# Altium PCB Super.PcbDoc
Units mil, origin at the board's own origin, x right, y up, seen from the top; angles counter-clockwise.
Board outline 8153.53 x 2519.95 mil, 2 copper layers (Top Layer, Bottom Layer); 130 components, 91 nets, 442 pads, 124 vias.
Unrouted connection lines stored in the file: 21.
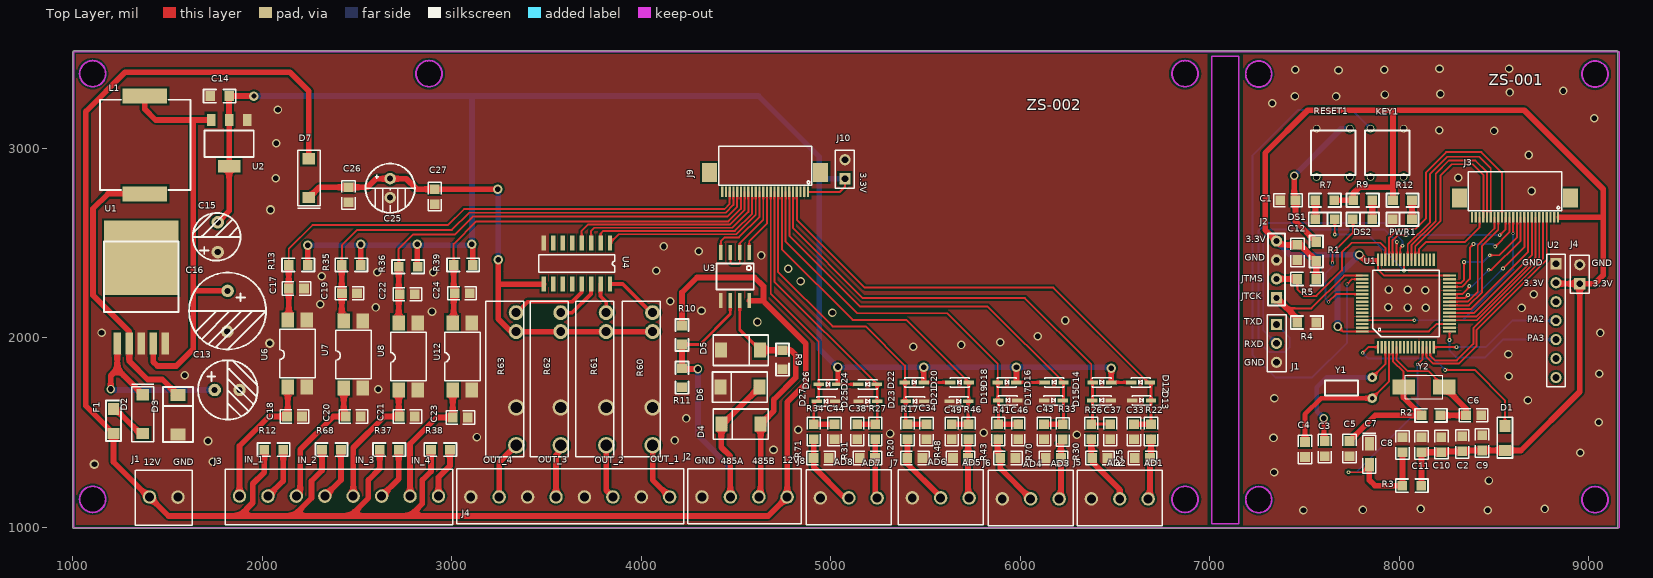
[diagram p0: Top Layer view]
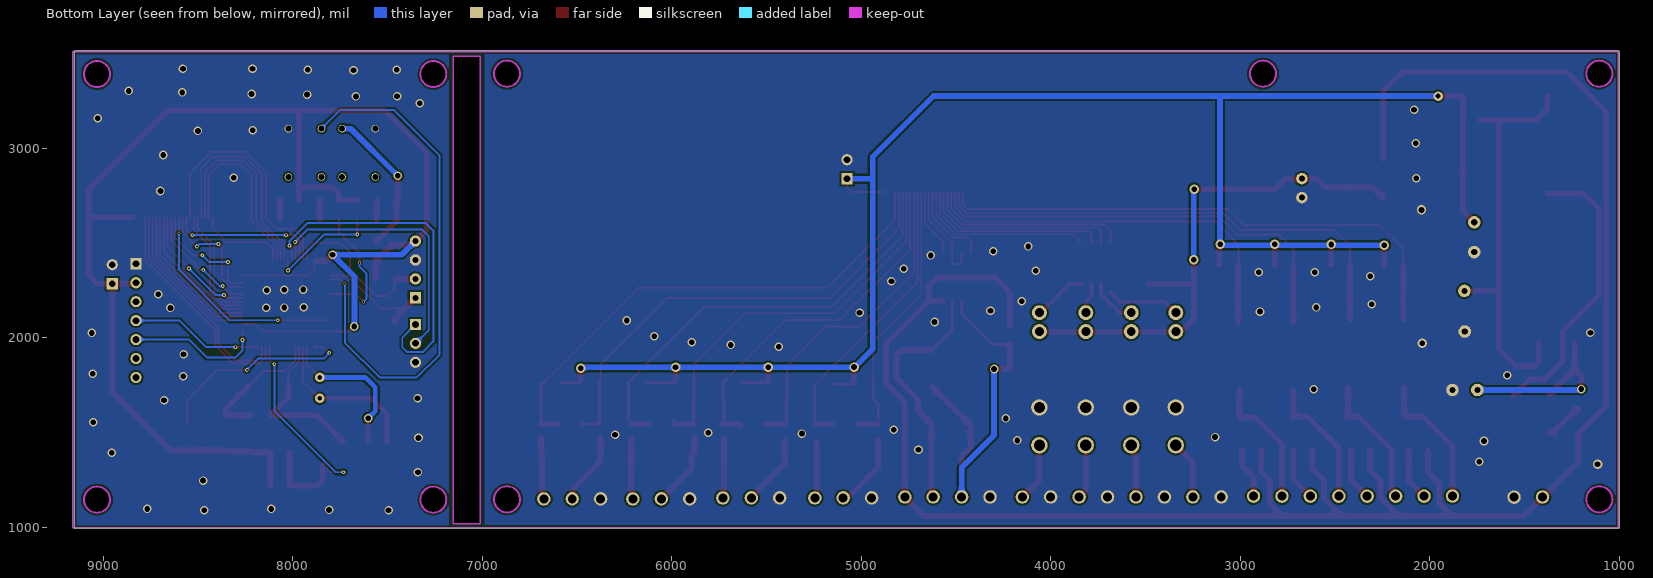
[diagram p1: Bottom Layer view, seen from below]

## Layer stack, top to bottom
Top Solder: solder mask 0.4, Solder Resist, Dk 3.5
Top Layer: signal copper 1.4
Dielectric 1: dielectric 12.6, FR-4, Dk 4.8
Bottom Layer: signal copper 1.4
Bottom Solder: solder mask 0.4, Solder Resist, Dk 3.5

## Board outline
1000.97,997.95 ccw(c1004.92,997.95) 1004.92,994 9150.54,994 ccw(c9150.54,997.95) 9153.34,995.16 ccw(c9150.54,997.95) 9154.5,997.95 9154.5,3507.95 ccw(c9150.54,3507.95) 9154.36,3508.98 ccw(c9150.54,3510) 9154.5,3510 ccw(c9150.54,3510) 9150.54,3513.95 1005,3513.95 ccw(c1005,3510) 1001.05,3510
cut-out: 7010,1020 7010,3485 7153.54,3485 7153.54,1020
cut-out: 6801.31,1148 ccw(c6870,1148) 6870,1079.31 ccw(c6870,1148) 6938.69,1148 ccw(c6870,1148) 6870,1216.69 ccw(c6870,1148)
cut-out: 6801.31,3394 ccw(c6870,3394) 6870,3325.31 ccw(c6870,3394) 6938.69,3394 ccw(c6870,3394) 6870,3462.69 ccw(c6870,3394)
cut-out: 1105,1079.31 cw(c1105,1148) 1036.31,1148 cw(c1105,1148) 1105,1216.69 cw(c1105,1148) 1173.69,1148 cw(c1105,1148)
cut-out: 1105,3325.31 cw(c1105,3394) 1036.31,3394 cw(c1105,3394) 1105,3462.69 cw(c1105,3394) 1173.69,3394 cw(c1105,3394)
cut-out: 2880,3325.31 cw(c2880,3394) 2811.31,3394 cw(c2880,3394) 2880,3462.69 cw(c2880,3394) 2948.69,3394 cw(c2880,3394)
cut-out: 7258.54,3323.26 cw(c7258.54,3391.95) 7189.85,3391.95 cw(c7258.54,3391.95) 7258.54,3460.64 cw(c7258.54,3391.95) 7327.23,3391.95 cw(c7258.54,3391.95)
cut-out: 9033.54,3323.26 cw(c9033.54,3391.95) 8964.85,3391.95 cw(c9033.54,3391.95) 9033.54,3460.64 cw(c9033.54,3391.95) 9102.23,3391.95 cw(c9033.54,3391.95)
cut-out: 7258.54,1077.26 cw(c7258.54,1145.95) 7189.85,1145.95 cw(c7258.54,1145.95) 7258.54,1214.64 cw(c7258.54,1145.95) 7327.23,1145.95 cw(c7258.54,1145.95)
cut-out: 8964.85,1145.95 ccw(c9033.54,1145.95) 9033.54,1077.26 ccw(c9033.54,1145.95) 9102.23,1145.95 ccw(c9033.54,1145.95) 9033.54,1214.64 ccw(c9033.54,1145.95)

## Design rules (kind name [scope] priority, off if disabled: settings)
Clearance Clearance_1 [InPolygon] p1: gap=10
Clearance [All] p2: gap=7
PolygonConnect [All] p1: connectstyle=Direct reliefconductorwidth=10 reliefentries=4 polygonreliefangle="90 Angle" airgapwidth=10
RoutingVias [All] p1: holewidth=28 width=50 viastyle="Through Hole" minholewidth=28 minwidth=50 maxholewidth=28 maxwidth=50
SolderMaskExpansion [All] p1: expansion=4
Width [All] p1: maxlimit=50 minlimit=5 preferedwidth=10
30 further rules are at their usual default settings.

## Classes and differential pairs
component class SUN1: C17 C18 C19 C20 C21 C22 C23 C24 J5 J6 J7 J8 J9 J10 R12 R13 R35 R36 R37 R38 R39 R68 U6 U7 U8 U12
component class SUN: C13 C14 C15 C16 C25 C26 C27 C33 C34 C37 C43 C44 C46 C49 D2 D3 D4 D5 D6 D7 D12 D13 D14 D15 D16 D17 D18 D19 D20 D21 D22 D23 D24 D25 D26 D27 F1 J1 J2 J3 J4 L1 R9 R10 R11 R17 R20 R22 R25 R26 R27 R30 R31 R33 R34 R41 R43 R46 R48 R60 R61 R62 R63 R70 R71 U1 U2 U3

## Components (designator, comment, footprint, x,y, rotation, side; value= is the part's Value field where it differs from the comment)
C1 "Cap" 0805C 7452.54,2725.95 r180 top
C2 "Cap" 0805C 8332.54,1400.95 r90 top
C3 "Cap" 0805C 7607.54,1375.95 r90 top
C4 "Cap" 0805C 7502.54,1370.95 r90 top
C5 "Cap" 0805C 7737.54,1375.95 r90 top
C6 "Cap" 0805C 8352.54,1590.95 r0 top
C7 "10uF" 3216T 7842.54,1440.95 r270 top
C8 "Cap" 0805c 8017.54,1395.95 r90 top
C9 "Cap" 0805C 8437.54,1405.95 r90 top
C10 "Cap" 0805C 8222.54,1475.95 r270 top
C11 "Cap" 0805C 8117.54,1395.95 r90 top
C12 "Cap" 0805C 7462.54,2410.95 r90 top
C13 "" "cap3.3-8 - duplicate" 1880,1725 r180 top
C14 "Cap" 0805 1725,3276 r0 top
C15 "Cap Pol1" C15 1765,2610 r270 top
C16 "" C16 1815,2065 r90 top
C17 "" 0805C 2220,2260 r180 top
C18 "" 0805C 2210,1585 r180 top
C19 "" 0805C 2500,2235 r180 top
C20 "" 0805C 2520,1585 r180 top
C21 "" 0805C 2805,1585 r180 top
C22 "" 0805C 2805,2230 r180 top
C23 "" 0805C 3085,1580 r180 top
C24 "" 0805C 3095,2235 r180 top
C25 "220UF" "RB 2.5/6.3" 2675,2740 r90 top
C26 "104" 0805C 2455,2715 r90 top
C27 "104" 0805C 2910,2705 r90 top
C33 "104" 0805C 6600,1464.84 r90 top
C34 "104" 0805C 5505,1464.84 r90 top
C37 "104" 0805C 6475,1464.84 r90 top
C38 "104" 0805C 5140,1464.84 r90 top
C43 "104" 0805C 6125,1464.84 r90 top
C44 "104" 0805C 5020,1464.84 r90 top
C46 "104" 0805C 5990,1464.84 r90 top
C49 "104" 0805C 5638,1464.84 r90 top
D1 "Diode 1N914" 1206 8557.54,1405.95 r90 top
D2 "M7" "SMA (DO-214AC)" 1370,1700 r270 top
D3 "1N5822" "smb do214aa" 1555,1490 r90 top
D4 "SMBJ6.5CA" "smb do214aa" 4630,1545 r180 top
D5 "SMBJ6.5CA" "smb do214aa" 4420,1935 r0 top
D6 "SMBJ6.5CA" "smb do214aa" 4625,1740 r180 top
D7 "M7" "SMA (DO-214AC)" 2245,2740 r90 top
D12 "1N4148" "SOD 323" 6585,1765 r0 top
D13 "1N4148" "SOD 323" 6690,1670 r180 top
D14 "1N4148" "SOD 323" 6480,1765 r180 top
D15 "1N4148" "SOD 323" 6380,1670 r0 top
D16 "1N4148" "SOD 323" 6130,1765 r0 top
D17 "1N4148" "SOD 323" 6225,1670 r180 top
D18 "1N4148" "SOD 323" 5980,1765 r180 top
D19 "1N4148" "SOD 323" 5885,1670 r0 top
D20 "1N4148" "SOD 323" 5630,1765 r0 top
D21 "1N4148" "SOD 323" 5725,1665 r180 top
D22 "1N4148" "SOD 323" 5490,1765 r180 top
D23 "1N4148" "SOD 323" 5395,1665 r0 top
D24 "1N4148" "SOD 323" 5145,1755 r0 top
D25 "1N4148" "SOD 323" 5245,1665 r180 top
D26 "1N4148" "SOD 323" 5035,1755 r180 top
D27 "1N4148" "SOD 323" 4925,1665 r0 top
DS1 "LED1" 0805-D 7557.54,2625.95 r0 top
DS2 "LED2" 0805-D 7857.54,2625.95 r180 top
F1 "PPTC" 1206 1215,1495 r90 top
J1 "Header 2" J1_2P 1330,1010 r0 top
J1 "Header 3" HDR1X3 7352.54,2070.95 r270 top
J2 "Header 4" J2_4P 4845,1310 r180 top
J2 "SWD" SWD 7352.54,2210.95 r180 top
J3 "Header 8" J3_8P 1805,1015 r0 top
J3 "Header 24" ffc 8837.54,2635.95 r180 top
J4 "Header 8" J3_8P 4225,1310 r180 top
J4 "Header 2" HDR1X2 8952.54,2285.95 r90 top
J5 "Header 3" J5_3P 6750,1300 r180 top
J6 "Header 3" J5_3P 6280,1300 r180 top
J7 "Header 3" J5_3P 5805,1305 r180 top
J8 "Header 3" J5_3P 5320,1305 r180 top
J9 "Header 24" ffc 4880,2770 r180 top
J10 "Header 2" HDR1X2 5075,2840 r90 top
KEY1 "SW-PB" SWITCH 8053.54,3093.95 r270 top
L1 "" l1212 1400,2780 r180 top
PWR1 "SYS" 0805-D 8067.54,2625.95 r180 top
R1 "Res2" 0805 7562.54,2505.95 r270 top
R2 "Res2" 0805 8217.54,1590.95 r180 top
R3 "Res2" 0805 8016.54,1219.95 r0 top
R4 "Res2" 0805 7562.54,2080.95 r180 top
R5 "Res2" 0805 7462.54,2310.95 r0 top
R7 "" 0805 7557.54,2725.95 r0 top
R9 "1K" 0805 4745.12,1934.88 r270 top
R9 "" 0805 7857.54,2725.95 r180 top
R10 "1K" 0805 4215,2065 r270 top
R11 "120" 0805 4215,1740 r90 top
R12 "1.6K" 0805 2010,1410 r0 top
R12 "" 0805 8067.54,2725.95 r180 top
R13 "10K" 0805 2240,2385 r180 top
R17 "1K" 0805R 5405,1544.65 r270 top
R20 "100" 0805R 5484.25,1366.14 r180 top
R22 "1K" 0805R 6690,1544.65 r270 top
R25 "100" 0805R 6605,1366.14 r0 top
R26 "1K" 0805R 6375,1544.65 r270 top
R27 "1K" 0805R 5235,1544.65 r270 top
R30 "100" 0805R 6460,1366.14 r180 top
R31 "100" 0805R 5153.54,1366.14 r0 top
R33 "1K" 0805R 6224.41,1543.31 r270 top
R34 "1K" 0805R 4910,1544.65 r270 top
R35 "10K" 0805 2520,2385 r180 top
R36 "10K" 0805 2820,2375 r180 top
R37 "1.6K" 0805 2620,1410 r0 top
R38 "1.6K" 0805 2890,1410 r0 top
R39 "10K" 0805 3110,2385 r180 top
R41 "1K" 0805R 5883.86,1544.65 r270 top
R43 "100" 0805R 5975,1366.14 r180 top
R46 "1K" 0805R 5727,1544.65 r270 top
R48 "100" 0805R 5645,1366.14 r0 top
R60 "relay" HF49FD/012-1H11 4060,2133 r270 top
R61 "relay" HF49FD/012-1H11 3815,2133 r270 top
R62 "relay" HF49FD/012-1H11 3575,2133 r270 top
R63 "relay" HF49FD/012-1H11 3340,2133 r270 top
R68 "1.6K" 0805 2315,1410 r0 top
R70 "100" 0805R 6135,1366.14 r0 top
R71 "100" 0805R 4989.17,1366.14 r180 top
RESET1 "SW-PB" SWITCH 7769.54,3093.95 r270 top
U1 "LM2576" TO-263-5 1235,1970 r0 top
U1 "STM32F103RCT6" STM32F103RCT6 7887.54,1950.95 r90 top
U2 "AMS1117-3.3" AMS1117-3.3 1955,2955 r180 top
U2 "YL-600N" HDR1X7 8827.54,2390.95 r270 top
U3 "SP3485" sop8 4570,2450 r270 top
U4 "MC1413" "SOP 16-1.27/3.9" 3835,2500 r270 top
U6 "EL814" SOP4 2135,1740 r90 top
U7 "EL814" SOP4 2430,1735 r90 top
U8 "EL814" SOP4 2720,1725 r90 top
U12 "EL814" SOP4 3005,1725 r90 top
Y1 "XTAL" tc-26 7857.54,1680.95 r180 top
Y2 "8MHz" Y2 8237.54,1740.95 r180 top

## Footprints (in the part's own frame and the unit in brackets; to place one, negate y for a bottom-side part, rotate by r counter-clockwise, add the part's x,y. Pads: shape width x height; smd on the part's side, far side on the other; paste and mask are expansions set on the pad)
0805 [mm]
  rect 1.3x1.3 smd: 1(0,0) 2(2.545,0)
  silkscreen extent -0.89,-0.89 3.43,0.89
0805-D [mm]
  rect 1.3x1.3 smd: 1(0,0) 2(2.596,0)
  silkscreen extent -0.89,-0.89 3.43,0.89
0805C [mm] "0805无极性电容"
  rect 1.3x1.3 smd: 1(0,0) 2(2.027,0)
  silkscreen extent -0.9,-0.89 2.92,0.89
0805c [mm] "0805无极性电容"
  rect 1.3x1.3 smd: 1(0,0) 2(2.027,0)
  silkscreen extent -0.9,-0.89 2.92,0.89
0805R [mm] "0805电阻"
  rect 1.3x1.3 smd: 1(0,0) 2(2.027,0)
  silkscreen extent -0.9,-0.89 2.92,0.89
1206 [mm]
  rect 1.5x1.6 smd: 1(0,0)
  rect 1.6x1.5 smd: 2(3.302,0)
  silkscreen extent -1.02,-1.02 4.44,1.02
3216T [mm] "3216钽电容"
  rect 1.8x1.2 smd: 1(-0.025,0) 2(2.819,0)
  silkscreen extent -1.4,-0.86 3.96,0.86
AMS1117-3.3 [mm]
  rect 1.14x1.65 smd: 1(0.889,-4.953) 2(3.302,-4.953) 3(5.715,-4.953)
  rect 3x1.65 smd: 4(3.302,1.27)
  silkscreen extent 0,-3.56 6.6,0
C15 [mil]
  round 66 hole 32: 1(0,0) 2(157.48,0)
  silkscreen extent -49,-132 203,120
C16 [mil]
  round 66 hole 32: 1(-31.5,0) 2(183.07,-1.97)
  silkscreen extent -127,-205 280,201
"cap3.3-8 - duplicate" [mil]
  round 66 hole 32: 1(0,0) 2(131.05,0)
  silkscreen extent -95,-157 218,157
ffc [mm]
  rect 0.3x1.4 smd: 1(0,0) 2(0.5,0) 3(1,0) 4(1.5,0) 5(2,0) 6(2.5,0) 7(3,0) 8(3.5,0) 9(4,0) 10(4.5,0) 11(5,0) 12(5.5,0) 13(6,0) 14(6.5,0) 15(7,0) 16(7.5,0) 17(8,0) 18(8.5,0) 19(9,0) 20(9.5,0) 21(10,0) 22(10.5,0) 23(11,0) 24(11.5,0)
  rect 2x2.5 smd: ""(-1.7,-2.6) ""(13.2,-2.6)
  silkscreen extent -0.48,-6.12 11.99,-0.89
HDR1X2 [mm] "Connector; Header; 2 Position"
  rect 1.5x1.5 hole 0.9: 1(0,0)
  round 1.5 hole 0.9: 2(2.54,0)
  silkscreen extent -1.27,-1.27 3.81,1.27
HDR1X3 [mm] "Connector; Header; 3 Position"
  rect 1.5x1.5 hole 0.9: 1(0,0)
  round 1.5 hole 0.9: 2(2.54,0) 3(5.08,0)
  silkscreen extent -1.27,-1.27 6.35,1.27
HDR1X7 [mm] "Connector; Header; 7 Position"
  rect 1.5x1.5 hole 0.9: 1(0,0)
  round 1.5 hole 0.9: 2(2.54,0) 3(5.08,0) 4(7.62,0) 5(10.16,0) 6(12.7,0) 7(15.24,0)
  silkscreen extent -1.27,-1.27 16.51,1.27
HF49FD/012-1H11 [mm]
  round 2 hole 1.2: 1(0,0) 2(2.54,0)
  round 2.2 hole 1.5: 3(12.7,0) 4(17.78,0)
  silkscreen extent -1.52,-4.06 19.3,1.02
J1_2P [mm]
  round 1.8 hole 1.2: 1(1.9,3.81) 2(5.71,3.8)
  silkscreen extent 0,0 7.62,7.4
J2_4P [mm]
  round 1.8 hole 1.2: 1(1.9,3.81) 2(5.71,3.8) 3(9.52,3.8) 4(13.33,3.8)
  silkscreen extent 0,0 15.23,7.4
J3_8P [mm]
  round 1.8 hole 1.2: 1(1.9,3.81) 2(5.71,3.8) 3(9.52,3.8) 4(13.33,3.8) 5(17.14,3.8) 6(20.95,3.8) 7(24.76,3.8) 8(28.57,3.8)
  silkscreen extent 0,0 30.48,7.4
J5_3P [mm]
  round 1.8 hole 1.2: 1(1.9,3.81) 2(5.71,3.8) 3(9.52,3.8)
  silkscreen extent 0,0 11.43,7.4
l1212 [mm]
  rect 6x2 smd: 1(0.508,0.508) 2(0.508,-12.608)
  silkscreen extent -5.6,-12.1 6.5,0
"RB 2.5/6.3" [mil]
  round 60 hole 32: 1(0,0) 2(100,0)
  silkscreen extent -80,-130 180,130
"SMA (DO-214AC)" [mm]
  rect 1.5x1.7 smd: 1(0,0) 2(5.213,0)
  silkscreen extent -1.4,-1.52 6.33,1.47
"smb do214aa" [mm]
  rect 1.6x2 smd: 1(0,0) 2(5.273,-0.003)
  silkscreen extent -1.02,-2.03 6.35,2.03
"SOD 323" [mm]
  rect 1.4x0.5 smd: 1(0,0) 2(2.5,0)
  silkscreen extent 0,-0.64 2.54,0.64
SOP4 [mm]
  rect 2x1.7 smd: 1(0,0) 2(0,-2.55) 3(9,-2.55) 4(9,0)
  silkscreen extent 1.25,-3.7 7.75,1.1
sop8 [mm]
  rect 2x0.5 smd: 1(0,0) 2(0,-1.27) 3(0,-2.54) 4(0,-3.81) 5(6.45,-3.81) 6(6.45,-2.54) 7(6.45,-1.27) 8(6.45,0)
  silkscreen extent 1.46,-4.4 4.96,0.6
"SOP 16-1.27/3.9" [mm] "150mil body,"
  rect 2x0.6 smd: 1(0,0) 2(0,-1.27) 3(0,-2.54) 4(0,-3.81) 5(0,-5.08) 6(0,-6.35) 7(0,-7.62) 8(0,-8.89) 9(5.5,-8.89) 10(5.5,-7.62) 11(5.5,-6.35) 12(5.5,-5.08) 13(5.5,-3.81) 14(5.5,-2.54) 15(5.5,-1.27) 16(5.5,0)
  silkscreen extent 1.58,-9.53 3.92,0.64
STM32F103RCT6 [mm]
  rect 1.7x0.3 smd: 1(0,0) 2(0,-0.5) 3(0,-1) 4(0,-1.5) 5(0,-2) 6(0,-2.5) 7(0,-3) 8(0,-3.5) 9(0,-4) 10(0,-4.5) 11(0,-5) 12(0,-5.5) 13(0,-6) 14(0,-6.5) 15(0,-7) 16(0,-7.5) 33(11.7,-7.5) 34(11.7,-7) 35(11.7,-6.5) 36(11.7,-6) 37(11.7,-5.5) 38(11.7,-5) 39(11.7,-4.5) 40(11.7,-4) 41(11.7,-3.5) 42(11.7,-3) 43(11.7,-2.5) 44(11.7,-2) 45(11.7,-1.5) 46(11.7,-1) 47(11.7,-0.5) 48(11.7,0)
  rect 0.3x1.7 smd: 17(2.1,-9.6) 18(2.6,-9.6) 19(3.1,-9.6) 20(3.6,-9.6) 21(4.1,-9.6) 22(4.6,-9.6) 23(5.1,-9.6) 24(5.6,-9.6) 25(6.1,-9.6) 26(6.6,-9.6) 27(7.1,-9.6) 28(7.6,-9.6) 29(8.1,-9.6) 30(8.6,-9.6) 31(9.1,-9.6) 32(9.6,-9.6) 49(9.6,2.1) 50(9.1,2.1) 51(8.6,2.1) 52(8.1,2.1) 53(7.6,2.1) 54(7.1,2.1) 55(6.6,2.1) 56(6.1,2.1) 57(5.6,2.1) 58(5.1,2.1) 59(4.6,2.1) 60(4.1,2.1) 61(3.6,2.1) 62(3.1,2.1) 63(2.6,2.1) 64(2.1,2.1)
  silkscreen extent 1.38,-8.21 10.31,0.71
SWD [mil]
  rect 60x60 hole 32: 1(0,0)
  round 60 hole 32: 2(0,-100) 3(0,-200) 4(0,-300)
  silkscreen extent -45,-340 45,40
SWITCH [mil]
  round 40 hole 31.5: 1(-10,-30) 2(-10,-205) 3(245,-205) 4(245,-30)
  silkscreen extent 0,-235 235,0
tc-26 [mm]
  round 1.27 hole 0.635: 1(0,0) 2(0,-2.8)
  silkscreen extent 1.92,-2.4 6.35,-0.4
TO-263-5 [mm]
  rect 1x3 smd: 1(0,0) 2(1.6,0) 3(3.2,0) 4(4.8,0) 5(6.4,0)
  rect 10x10 smd: 6(3.2,11.5)
  silkscreen extent -1.8,4.24 8.2,13.7
Y2 [mm]
  rect 3x2 smd: 1(0,0) 2(5.45,0)
  silkscreen extent 0.2,-1.6 5.2,1.6

## Part data
C1 C2 C3 C4 C5 C6 C8 C9 C10 C11 C12 C14: "Capacitor"
C7: library part CAP-POL1
C13 C16 C17 C18 C19 C20 C21 C22 C23 C24: library part Cap, "Capacitor"
C15: "Polarized Capacitor (Radial)"
C25: library part CAP-POL2
C26 C27 C33 C34 C37 C38 C43 C44 C46 C49: library part CAP
D1: "High Conductance Fast Diode"
D3: library part "D Zener", "Zener Diode"
DS1 DS2 PWR1: library part LED0, "Typical INFRARED GaAs LED"
J1 J4 J10: "Header, 2-Pin"
J1 J5 J6 J7 J8: "Header, 3-Pin"
J2: "Header, 4-Pin"
J3 J4: "Header, 8-Pin"
J3 J9: "Header, 24-Pin"
KEY1 RESET1: "Switch"
L1: library part Inductor, "Inductor"
R1 R2 R3 R4 R5: "Resistor"
R7 R9 R12: library part Res2, "Resistor"
R9 R10 R11 R12 R13 R35 R36 R37 R38 R39 R68: library part Res
R17 R20 R22 R25 R26 R27 R30 R31 R33 R34 R41 R43 R46 R48 R70 R71: library part RES
U2: library part "Header 7", "Header, 7-Pin"
U6 U7 U8 U12: library part TLP281
Y1: "Crystal Oscillator"
Y2: library part XTAL, "Crystal Oscillator"

## Via types
v1: diameter 45, hole 30, Top Layer to Bottom Layer, tented both sides, 85 vias
v2: diameter 20, hole 10, Top Layer to Bottom Layer, tented both sides, 21 vias
v3: diameter 50, hole 30, Top Layer to Bottom Layer, tented both sides, 13 vias
v4: diameter 15, hole 10, Top Layer to Bottom Layer, tented both sides, 4 vias
v5: diameter 50, hole 28, Top Layer to Bottom Layer, tented both sides, 1 vias

## Nets (pads, with @x,y where several pads share a name; then routed paths per layer and width w, separated by ;. In a path a pad name is that pad's centre, name@x,y a point inside that pad or via, vN(x,y) a via of type N, cw(c..) or ccw(c..) an arc to the next point about the centre after c; other vN are vias at no path point)
32.768K: C3.2 U1.3@7926.91,1950.95 Y1.2 | length 803.1
  Top Layer w10: Y1.2 7926.91,1860.56 U1.3@7926.91,1950.95
  Top Layer w25: v1(7602.54,1575.95) 7602.54,1460.76 C3.2
  Bottom Layer w25: v1(7602.54,1575.95) 7565.04,1613.45 7565.04,1738.45 7617.78,1791.19 Y1.2
485A: D4.2 D6.1 J2.3@4470.2,1160.39 R10.2 R11.2 U3.6 | length 2029.3
  Top Layer w15: R10.2 4309.81,1964.81 4470,2125 U3.6
  Top Layer w30: R10.2 R11.2 4219.56,1835.63 v1(4299.21,1835.63) ; D4.2 4422.41,1422.59 4470.2,1374.8 J2.3@4470.2,1160.39 ; D4.2@4430.12,1545.12 D6.1
  Bottom Layer w30: v1(4299.21,1835.63) 4299.21,1485.79 4470.2,1314.8 J2.3@4470.2,1160.39
485B: D4.1 D5.2 J2.2@4620.2,1160.39 R9.1@4745.12,1934.88 U3.7 | length 1319.9
  Top Layer w15: U3.7 4520,2042.47 D5.2
  Top Layer w30: D5.2 4745.12,1934.88 4790.12,1934.88 4815,1910 4815,1790 4700,1675 4700,1615 D4.1 J2.2@4630,1170.2
AD1: J5.1 R22.2 R25.2 | length 324
  Top Layer w30: J5.1 6684.8,1159.61 R25.2@6684.8,1375 ; R25.2@6690,1380.2 R22.2@6690,1475.2
AD2: J5.2 R26.2 R30.2 | length 379.7
  Top Layer w30: R30.2@6375,1385.2 R26.2@6375,1475.2 ; R30.2@6380.2,1380 6380.2,1344.8 6525.2,1199.8 J5.2
AD3: J6.1 R33.2 R70.2 | length 310.7
  Top Layer w30: J6.1@6214.8,1159.61 6214.8,1370 6214.8,1470 R33.2@6215,1470.2
AD4: J6.2 R41.2 R43.2 | length 375.9
  Top Layer w30: 5880,1395.2 R41.2@5880,1475.2 ; R43.2@5895.2,1380 5895.2,1310.39 J6.2
AD5: J7.1 R46.2 R48.2 | length 309.6
  Top Layer w30: J7.1@5724.8,1160.39 5724.8,1360 R46.2@5724.8,1470
AD6: J7.2 R17.2 R20.2 | length 356.1
  Top Layer w30: R17.2@5405,1455.2 5405,1365.2 5400.2,1340 J7.2@5570.2,1170
AD7: J8.1 R27.2 R31.2 | length 299.4
  Top Layer w30: R27.2@5235,1450.2 5235,1165.2 J8.1
AD8: J8.2 R34.2 R71.2 | length 394.5
  Top Layer w30: R34.2@4910,1460.2 4910,1318.35 5072.95,1155.39 J8.2
GND: C1.2 C2.2 C3.1 C4.1 C5.1 C6.2 C7.1 C8.2 C9.2 C10.1 C11.2 C12.1 C13.1 C14.1 C15.2 C16.1 C17.1 C18.1 C19.1 C20.1 C21.1 C22.1 C23.1 C24.1 C25.1 C26.1 C27.1 C33.1 C34.1 C37.1 C38.1 C43.1 C44.1 C46.1 C49.1 D3.1 D5.1 D6.2 D13.2 D15.2 D17.2 D19.2 D21.2 D23.2 D25.2 D27.2 J1.2@1554.8,1159.61 J1.3 J2.3@7352.54,2410.95 J2.4@4320.2,1160.39 J3.2@8817.86,2635.95 J4.2 J4.4 J4.6 J4.8 J5.3 J6.3 J7.3 J8.3 J9.2 J10.2 KEY1.1 PWR1.2 R4.1 R9.2@4745.12,1834.69 R20.1 R25.1 R30.1 R31.1 R43.1 R48.1 R60.3 R61.3 R62.3 R63.3 R70.1 R71.1 RESET1.2 U1.3@1360.98,1970 U1.5@1486.97,1970 U1.12 U1.18 U1.28 U1.31 U1.47 U1.60 U1.63 U2.1 U3.5 U4.8 U6.2 U6.3 U7.2 U7.3 U8.2 U8.3 U12.2 U12.3
  other v1: 7494.54,1089.95 8467.54,1090.95 7808.54,1091.95 8113.54,1096.95 8767.54,1096.95 8473.54,1246.95 7339.54,1290.95 1738.19,1345.47 8955.54,1393.95 4697.83,1409.45 1713.58,1455.71 4176.18,1458.66 7336.54,1471.95 3132.87,1476.38 6299.21,1489.17 5312.99,1495.08 5807.09,1499.02 4828.74,1514.76 9053.54,1554.95 4238.19,1574.8 8679.54,1669.95 7341.54,1680.95 2612.2,1729.33 8578.54,1797.95 1590.55,1803.15 9055.54,1810.95 8576.54,1912.95 5436.02,1952.76 5687.99,1962.6 5893.7,1977.36 6092.52,2008.86 9061.54,2025.95 1151.57,2026.57 4613.19,2083.66 6237.2,2091.54 5008.86,2131.89 2895.67,2138.78 4317.91,2143.7 8645.54,2157.95 8139.54,2158.95 2599.41,2160.43 8045.54,2159.95 7942.54,2160.95 2306.1,2177.17 4152.56,2192.91 8710.54,2230.95 8137.54,2251.95 8044.54,2253.95 7945.54,2254.95 4840.55,2299.21 2312.99,2324.8 2607.28,2346.46 2902.56,2346.46 4078.74,2353.35 4775.59,2364.17 4632.87,2435.04 4304.13,2457.68 4118.11,2482.28 8698.54,2774.95 2071.85,2842.52 8311.54,2844.95 8683.54,2964.95 2073.82,3027.56 8500.54,3091.95 8210.54,3094.95 9029.54,3158.95 2082.68,3203.74 7329.54,3237.95 7666.54,3273.95 7449.54,3274.95 7924.54,3283.95 8217.54,3286.95 8583.54,3294.95 8865.54,3302.95 7679.54,3411.95 7451.54,3414.95 7920.54,3414.95 8212.54,3419.95 8579.54,3420.95
  other v3: 1114.17,1332.68 2039.37,1971.46 2043.31,2675.2
JTCK: J2.1@7352.54,2210.95 R4.2 U1.49 | length 644.4
  Top Layer w10: 7407.54,2155.95 7536.54,2155.95 7709.5,2328.91 U1.49
  Top Layer w30: J2.1@7352.54,2210.95 7407.54,2155.95 7462.35,2101.14 R4.2
JTMS: J2.2@7352.54,2310.95 R5.1 U1.46 | length 890.2
  Top Layer w10: R5.1 7462.54,2255.95 7497.54,2220.95 7562.54,2220.95 7697.54,2355.95 7697.54,2450.95 7748.54,2501.95 7899.54,2501.95 7926.91,2474.58 U1.46
  Top Layer w30: J2.2@7352.54,2310.95 R5.1
KEY1: KEY1.2 U1.50 | length 2838.7
  Top Layer w10: v4(7724.54,2283.95) 7749.81,2309.22 U1.50
  Bottom Layer w10: v4(7724.54,2283.95) 7724.54,1974.95 7540.54,1790.95 7346.54,1790.95 7225.54,1911.95 7225.54,2960.95 7467.54,3202.95 7750.54,3202.95 KEY1.2@7849.04,3104.45
LED0: DS1.2 U1.41 | length 582
  Top Layer w10: v2(7659.73,2544.76) DS1.2 ; v2(8025.34,2354.95) U1.41
  Bottom Layer w10: v2(7659.73,2544.76) 7835.53,2544.76 v2(8025.34,2354.95)
LED1: DS2.2 U1.54 | length 696.9
  Top Layer w10: v4(7626.54,2189.95) 7667.04,2230.45 ; v4(7647.54,2395.95) 7647.54,2445.95 7755.36,2553.76 DS2.2 ; 7667.04,2230.48 U1.54
  Bottom Layer w10: v4(7626.54,2189.95) 7611.54,2204.95 7611.54,2339.95 7647.54,2375.95 v4(7647.54,2395.95)
NetC1_1: C1.1 R1.1 RESET1.1 | length 784.7
  Top Layer w30: C1.1@7445.54,2732.95 v1(7445.54,2854.95) ; C1.1 7452.54,2615.95 R1.1
  Bottom Layer w30: v1(7445.54,2854.95) 7694.54,3103.95 7726.54,3103.95 RESET1.1
NetC4_2: C4.2 U1.4@7946.6,1950.95 Y1.1 | length 842.3
  Top Layer w10: Y1.1 7946.6,1770.01 U1.4@7946.6,1950.95
  Top Layer w25: C4.2 7502.54,1595.95 7587.54,1680.95 Y1.1
NetC5_2: C5.2 R2.2 U1.5@7966.28,1950.95 Y2.2 | length 858.4
  Top Layer w10: U1.5@7966.28,1950.95 7966.28,1877.21 8022.98,1820.52 Y2.2
  Top Layer w30: C5.2 7872.74,1590.95 R2.2 8022.98,1685.33 Y2.2
NetC6_1: C6.1 R2.1 U1.6@7985.97,1950.95 Y2.1 | length 711.3
  Top Layer w10: U1.6@7985.97,1950.95 7985.97,1882.53 8042.54,1825.95 8152.54,1825.95 Y2.1
  Top Layer w30: R2.1 C6.1 8352.54,1625.95 Y2.1
NetC7_2: C7.2 C8.1 R3.1 U1.13 | length 1415.6
  Top Layer w10: v2(7732.54,1290.95) 7803.54,1290.95 C7.2 ; v2(8097.54,1860.95) 8123.76,1887.17 U1.13
  Top Layer w30: C7.2 7842.54,1248.95 7871.54,1219.95 R3.1 8017.54,1220.95 C8.1
  Bottom Layer w10: v2(7732.54,1290.95) 7773.54,1290.95 8097.54,1614.95 v2(8097.54,1860.95)
NetC13_2: C13.2 D2.1 U1.1@1235,1970 | length 994.4
  Top Layer w30: v1(1200,1730) 1200,1800 1235,1835 ; U1.1@1235,1970 1235,1835 ; D2.1 1235,1835
  Bottom Layer w30: v1@1200,1725 C13.2
NetD1_2: D1.2 U1.1@7887.54,1950.95 | length 1081
  Top Layer w10: v2(7807.54,1920.95) 7837.54,1950.95 U1.1@7887.54,1950.95 ; v2(8242.54,1830.95) 8397.54,1830.95 8557.54,1670.95 D1.2
  Bottom Layer w10: v2(7807.54,1920.95) 7837.54,1890.95 8182.54,1890.95 v2(8242.54,1830.95)
NetD2_2: D2.2 F1.2 | length 206.9
  Top Layer w30: F1.2 1225,1625 1350.22,1499.78 D2.2@1370,1499.78
NetD3_2: D3.2 L1.1 U1.2@1297.99,1970 | length 1520.9
  Top Layer w30: L1.1 1185,2760 1107,2682 1107,2225 1297.99,2034.01 1297.99,1970 1297.99,1877.01 1395,1780 1472.71,1780 D3.2
NetDS1_1: DS1.1 R7.1 | length 100
  Top Layer w30: DS1.1 R7.1
NetDS2_1: DS2.1 R9.1@7857.54,2725.95 | length 100
  Top Layer w30: DS2.1 R9.1@7857.54,2725.95
NetPWR1_1: PWR1.1 R12.1@8067.54,2725.95 | length 100
  Top Layer w30: PWR1.1 R12.1@8067.54,2725.95
NetR60_1: R60.1 U4.16 | length 311.2
  Top Layer w20: U4.16 3902.54,2283.46 4060,2126 R60.1@4060,2105
NetR61_1: R61.1 U4.15 | length 190.9
  Top Layer w20: U4.15 3785,2220 3815,2190 R61.1@3815,2105
NetR62_1: R62.1 U4.14 | length 252.5
  Top Layer w20: R62.1 3636,2133 3735,2232 U4.14
NetR63_1: R63.1 U4.13 | length 416.1
  Top Layer w20: R63.1@3340,2105 3340,2131 3399,2190 3635,2190 3685,2240
PA0: C33.2 D12.2 D13.1 J3.4@8778.49,2635.95 J9.4 R22.1 U1.14 | length 3866.7
  Top Layer w10: J9.4 4820.94,2624.06 5180,2265 6175,2265 D12.2@6679.21,1760.79 ; U1.14 8143.45,1900.05 8179.54,1863.95 8314.54,1863.95 8408.54,1957.95 8408.54,2042.95 8778.49,2412.9 J3.4@8778.49,2635.95
  Top Layer w15: R22.1 D13.1 D12.2@6690,1758.43
  Top Layer w30: C33.2 R22.1
PA1: C37.2 D14.2 D15.1 J3.5@8758.8,2635.95 J9.5 R26.1 U1.15 | length 3605.2
  Top Layer w10: J9.5 4801.26,2578.74 5170,2210 6025,2210 6375,1860 D14.2@6375,1771.57 ; U1.15 8163.13,1905.36 8187.54,1880.95 8304.54,1880.95 8391.54,1967.95 8391.54,2049.99 8758.8,2417.25 J3.5@8758.8,2635.95
  Top Layer w15: R26.1 C37.2 ; R26.1@6381.57,1551.22 D14.2
PA2: U1.16 U2.4@8827.54,2090.95 | length 702.7
  Top Layer w10: U1.16 v2(8302.54,1950.95)
  Bottom Layer w10: v2(8302.54,1950.95) 8457.54,1950.95 8597.54,2090.95 U2.4@8827.54,2090.95
PA3: U1.17 U2.5 | length 717.1
  Top Layer w10: v2@8265.5,1988.91 U1.17
  Bottom Layer w10: v2(8265.04,1988.45) 8265.04,1933.45 8302.54,1895.95 8452.54,1895.95 8547.54,1990.95 U2.5
PA4: C43.2 D16.2 D17.1 J3.6@8739.12,2635.95 J9.6 R33.1 U1.20 | length 3109.4
  Top Layer w10: J9.6 4781.57,2538.43 5155,2165 5828.43,2165 D16.2 ; U1.20 8410.19,2092.68 8739.12,2421.61 J3.6@8739.12,2635.95
  Top Layer w15: R33.1@6228.43,1563.43 D16.2
  Top Layer w30: C43.2@6125,1544.8 R33.1@6209.8,1544.8
PA5: C46.2 D18.2 D19.1 J3.7@8719.43,2635.95 J9.7 R41.1 U1.21 | length 2863.6
  Top Layer w10: J9.7 4761.89,2508.11 5140,2130 5615,2130 5881.57,1863.43 D18.2 ; U1.21 8405.84,2112.37 8719.43,2425.97 J3.7@8719.43,2635.95
  Top Layer w15: R41.1@5880,1555 5885,1560 D19.1 ; D19.1@5881.57,1673.43 D18.2
  Top Layer w30: R41.1@5880,1544.65 5979.45,1544.65 C46.2@5989.8,1555
PA6: C49.2 D20.2 D21.1 J3.8@8699.75,2635.95 J9.8 R46.1 U1.22 | length 2646
  Top Layer w10: J9.8 4742.2,2467.8 5115,2095 5398.43,2095 D20.2 ; U1.22 8395.65,2132.05 8699.75,2436.16 J3.8@8699.75,2635.95
  Top Layer w15: R46.1@5725,1549 D21.1 5728.43,1668.43 D20.2
  Top Layer w30: C49.2@5640,1539.8 5644.84,1544.65 R46.1
PA7: C34.2 D22.2 D23.1 J3.9 J9.9 R17.1 U1.23 | length 2423.2
  Top Layer w10: J9.9 4722.52,2347.48 5010,2060 5185,2060 5391.57,1853.43 D22.2 ; U1.23 8378.33,2151.74 8680.06,2453.47 J3.9
  Top Layer w15: D23.1@5391.57,1668.43 D22.2 ; R17.1@5395,1545 D23.1
  Top Layer w30: R17.1 C34.2
PA9: J1.1@7352.54,2070.95 U1.42 | length 1852.9
  Top Layer w10: U1.42 8005.65,2474.06 v2(8017.54,2485.95)
  Bottom Layer w10: J1.1@7352.54,2070.95 7422.54,2000.95 7422.54,1949.95 7398.54,1925.95 7312.54,1925.95 7257.54,1980.95 7257.54,2565.95 7297.54,2605.95 7922.54,2605.95 8017.54,2510.95 v2(8017.54,2485.95)
PA10: J1.2@7352.54,1970.95 U1.43 | length 1433.2
  Top Layer w10: U1.43 v2@7985.97,2504.38
  Bottom Layer w10: J1.2@7352.54,1970.95 7282.54,2040.95 7282.54,2535.95 7317.54,2570.95 7922.54,2570.95 v2(7987.54,2505.95)
PA11: J3.15 J9.15 U1.44 U4.1 | length 1739.3
  Top Layer w10: U4.1 3882,2547 4502,2547 4604.41,2649.41 J9.15 ; U1.44 7965.54,2412.32 7965.54,2515.95 7991.54,2541.95 v2(8036.54,2541.95) ; v2(8530.54,2541.95) 8561.95,2573.36 J3.15
  Bottom Layer w10: v2(8036.54,2541.95) v2(8530.54,2541.95)
PA12: J3.16 J9.16 U1.45 U4.2 | length 2331.5
  Top Layer w10: U4.2 3785,2550 3799,2564 4494,2564 4584.72,2654.72 J9.16 ; U1.45 7946.6,2529.05 7993.5,2575.95 8087.54,2575.95 8141.54,2629.95 8141.54,2873.95 8247.54,2979.95 8433.54,2979.95 8542.27,2871.23 J3.16
PB0: C38.2 D24.2 D25.1 J3.10 J9.10 R27.1 U1.26 | length 2195.6
  Top Layer w10: J9.10 4702.83,2297.17 5243.43,1756.57 D24.2 ; U1.26 8347.39,2210.79 v2(8362.54,2225.95) ; v2(8547.54,2365.95) 8660.38,2478.79 J3.10
  Top Layer w15: R27.1@5245,1540 D25.1 D24.2@5245,1753.43
  Top Layer w30: C38.2@5154.84,1544.65 R27.1
  Bottom Layer w10: v2(8362.54,2225.95) 8407.54,2225.95 v2(8547.54,2365.95)
PB1: C44.2 D26.2 D27.1 J3.11 J9.11 R34.1 U1.27 | length 2069.4
  Top Layer w10: J9.11 4683.15,2231.85 4936.57,1978.43 D26.2 ; U1.27 8332.07,2230.48 8369.54,2267.95 v2(8369.54,2272.95) ; v2(8472.54,2358.95) 8486.54,2358.95 8640.69,2513.1 J3.11
  Top Layer w15: R34.1 4910,1650 D27.1 4936.57,1676.57 D26.2
  Top Layer w30: R34.1 C44.2
  Bottom Layer w10: v2(8369.54,2272.95) 8386.54,2272.95 v2(8472.54,2358.95)
PB3: U1.55
PB4: U1.56
PB5: U1.57
PB6: U1.58
PB7: U1.59
PB8: J3.13 J9.13 U1.61 U3.2 U3.3 | length 1718.2
  Top Layer w10: U3.3 4470,2397.13 4477.36,2389.76 4512.8,2389.76 4520,2396.97 U3.2 4520,2500 4643.78,2623.78 J9.13 ; U1.61 v2(8079.81,2092.69) ; v4(8601.32,2550.95) J3.13
  Bottom Layer w10: v2(8079.81,2092.69) 8334.28,2092.69 8602.54,2360.95 8600.54,2362.95 8601.32,2363.73 v4(8601.32,2550.95)
PB9: U1.62
PB10: J3.14 J9.14 U1.29 U3.4 | length 1070.7
  Top Layer w10: U3.4 4420,2510 4440,2530 4515,2530 4624.09,2639.09 J9.14 ; U1.29 8331.44,2269.85 8372.54,2310.95 8372.54,2475.95 v2(8392.54,2495.95) ; v2(8506.54,2481.95) 8581.64,2557.05 J3.14
  Bottom Layer w10: v2(8392.54,2495.95) 8492.54,2495.95 v2(8506.54,2481.95)
PB11: J3.12 J9.12 U1.30 U3.1 | length 976.6
  Top Layer w10: U3.1 4570,2510 4663.46,2603.46 J9.12 ; U1.30 8326.13,2289.53 8342.54,2305.95 v2(8342.54,2400.95) ; v2(8477.54,2435.95) 8527.54,2435.95 8622.04,2530.45 8622.04,2634.92 J3.12
  Bottom Layer w10: v2(8342.54,2400.95) 8442.54,2400.95 v2(8477.54,2435.95)
PB12: U1.33
PB13: U1.34
PB14: U1.35
PB15: U1.36
PC0: U1.8
PC1: U1.9
PC2: U1.10
PC3: U1.11
PC4: J3.17 J9.17 U1.24 U4.3 | length 1672.5
  Top Layer w10: U4.3 3735,2565 3751,2581 4481,2581 4565.04,2665.04 J9.17 ; U1.24 8368.02,2171.42 8437.54,2240.95 8437.54,2484.95 8522.58,2569.99 J3.17
PC5: J3.18 J9.18 U1.25 U4.4 | length 1665.8
  Top Layer w10: U4.4 3685,2565 3718,2598 4468,2598 4545.35,2675.35 J9.18 ; U1.25 8362.7,2191.11 8414.54,2242.95 8414.54,2488.95 8502.9,2577.31 J3.18
PC6: C17.2 J3.22 J9.22 R13.2 U1.37 U6.4 | length 3335.2
  Top Layer w10: R13.2 2139.81,2469.81 2265,2595 2980,2595 3065,2680 4440,2680 4466.61,2706.61 J9.22 ; U1.37 8104.08,2467.49 8142.54,2505.95 8347.54,2505.95 8424.16,2582.57 J3.22
  Top Layer w30: C17.2@2139.81,2260.39 R13.2 ; U6.4@2140.2,2099.53 C17.2
PC7: C19.2 J3.21 J9.21 R35.2 U1.38 U7.4 | length 3610.8
  Top Layer w10: R35.2 2419.81,2489.81 2500,2570 3001.1,2570 3091.1,2660 4445,2660 4486.3,2701.3 J9.21 ; U1.38 8084.39,2482.8 8217.54,2615.95 8217.54,2855.95 8277.54,2915.95 8387.54,2915.95 8443.84,2859.65 J3.21
  Top Layer w30: U7.4@2419.81,2099.52 R35.2
PC8: C22.2 J3.20 J9.20 R36.2 U1.39 U8.4 | length 3418.7
  Top Layer w10: R36.2 2719.81,2469.81 2795,2545 3015,2545 3110,2640 4455,2640 4505.98,2690.98 J9.20 ; U1.39 8064.71,2488.12 8192.54,2615.95 8192.54,2865.95 8262.54,2935.95 8402.54,2935.95 8463.53,2874.97 J3.20
  Top Layer w30: U8.4@2719.81,2079.52 R36.2
PC9: C24.2 J3.19 J9.19 R39.2 U1.40 U12.4 | length 3238.3
  Top Layer w10: R39.2 3009.81,2494.81 3130,2615 4460,2615 4525.67,2680.67 J9.19 ; U1.40 8045.02,2493.43 8162.54,2610.95 8162.54,2865.95 8252.54,2955.95 8422.54,2955.95 8483.21,2895.28 J3.19
  Top Layer w30: U12.4@3009.81,2084.14 R39.2
PC10: U1.51
PC11: U1.52
PC12: U1.53
PC13: U1.2@7907.23,1950.95
RESET: U1.7
SWITCH_IN1_1: C18.2 J3.1@1879.8,1165 U6.1 | length 729.7
  Top Layer w30: J3.1@1879.8,1165 1879.8,1429.8 2035,1585 C18.2 ; C18.2@2135,1589.8 U6.1
SWITCH_IN1_2: J3.2@2029.8,1164.61 R12.2@2110.19,1410 | length 278.7
  Top Layer w30: J3.2@2029.8,1164.61 2110.19,1244.99 R12.2@2110.19,1410
SWITCH_IN2_1: C20.2 J3.3@2179.8,1164.61 U7.1 | length 706.2
  Top Layer w30: J3.3@2179.8,1164.61 2200,1184.8 2200,1410 2375,1585 C20.2 ; C20.2@2430,1595.2 U7.1
SWITCH_IN2_2: J3.4@2329.8,1164.61 R68.2 | length 280.8
  Top Layer w30: J3.4@2329.8,1164.61 2415.19,1249.99 R68.2
SWITCH_IN3_1: C21.2 J3.5@2479.8,1164.61 U8.1 | length 703.8
  Top Layer w30: J3.5@2479.8,1164.61 2479.8,1419.8 2645,1585 C21.2 ; C21.2@2720,1590.2 U8.1
SWITCH_IN3_2: J3.6@2629.8,1164.61 R37.2 | length 282.8
  Top Layer w30: J3.6@2629.8,1164.61 2720.19,1254.99 R37.2
SWITCH_IN4_1: C23.2 J3.7@2779.8,1164.61 U12.1 | length 703.5
  Top Layer w30: J3.7@2779.8,1164.61 2779.8,1439.8 2920,1580 C23.2 ; C23.2@3005,1580.2 U12.1
SWITCH_IN4_2: J3.8@2929.8,1164.61 R38.2 | length 270.4
  Top Layer w30: J3.8@2929.8,1164.61 2929.8,1264.8 2990.19,1325.19 R38.2
SWITCH_OUT_1: J4.1@4150.2,1160 R60.4 | length 310.4
  Top Layer w30: R60.4 4060,1250.2 J4.1@4150.2,1160
SWITCH_OUT_2: J4.3 R61.4 | length 287.2
  Top Layer w30: R61.4 3815,1195.59 J4.3
SWITCH_OUT_3: J4.5 R62.4 | length 282.9
  Top Layer w30: J4.5 3550.2,1380.2 3575,1405 R62.4
SWITCH_OUT_4: J4.7 R63.4 | length 309.8
  Top Layer w30: J4.7 3250.2,1343.2 R63.4
VCC3.3: C2.1 C9.1 C10.2 C11.1 C12.2 C14.2 C15.1 D1.1 D12.1 D14.1 D16.1 D18.1 D20.1 D22.1 D24.1 D26.1 J2.4@7352.54,2510.95 J3.1@8837.54,2635.95 J4.1@8952.54,2285.95 J9.1 J10.1 R1.2 R3.2 R5.2 R7.2 R9.2@7757.35,2725.95 R12.2@7967.35,2725.95 R13.1 R35.1 R36.1 R39.1 U1.19 U1.32 U1.48 U1.64 U2.2 U2.4@1825,2905 | length 18184.9
  Top Layer w10: v1(7675.54,2059.95) 7701.87,2033.63 U1.64 8156.22,2033.63 8195.59,2073 U1.19 ; U1.48 7887.54,2361.95 7920.59,2328.9 U1.32
  Top Layer w12: J9.1 5047,2770 5075,2798 J10.1 ; J3.1@8837.54,2635.95 8845.76,2635.95
  Top Layer w15: D26.1 D24.1 ; D22.1@5500,1765 D20.1 ; D18.1 D16.1 ; D14.1 D12.1
  Top Layer w30: C15.1 1825,2670 1825,2905 U2.2@1825,3150 ; U2.2@1824.81,3160.19 C14.2@1824.81,3265 ; C14.2 v5(1956,3276) ; R13.1 v3(2240,2489) ; R35.1 v3(2520,2493) ; R36.1@2818,2384 v3(2818,2494) ; v3(3106,2494) 3110,2490 R39.1 ; v3(5038,1846) 5040,1844 5040,1765 ; 5490,1775 v3(5490,1845) ; 5980,1775 v3(5980,1845) ; 6480,1775 v3(6480,1840) ; J2.4@7372.35,2491.14 7352.54,2510.95 7292.54,2570.95 7292.54,2975.95 7517.54,3200.95 7966.54,3200.95 ; J2.4@7372.74,2490.76 C12.2 7477.55,2490.76 R1.2 ; R5.2 R1.2@7562.73,2405.57 ; R7.2 7757.35,2725.95 7757.35,2762.76 7789.54,2794.95 7967.35,2794.95 ; v1(7790.04,2438.45) 7822.54,2405.95 7875.54,2405.95 ; R12.2@7967.35,2725.95 7967.35,2794.95 ; R3.2 8117.54,1220.76 C11.1 ; C11.1@8117.74,1396.15 C10.2 ; C10.2@8227.35,1400.95 C2.1 ; C2.1@8337.54,1405.95 C9.1 D1.1 8642.54,1405.95 8952.54,1715.95 J4.1@8952.54,2285.95 ; U2.2@8832.54,2285.95 J4.1@8952.54,2285.95 ; 8845.76,2635.95 9075.54,2635.95 9076.54,2636.95 ; 7966.54,3200.95 7967.35,3200.14 7967.35,2794.95 ; 7966.54,3200.95 8659.54,3200.95 9076.54,2783.95 9076.54,2636.95 ; J4.1@8952.54,2285.95 9031.54,2285.95 9076.54,2330.95 9076.54,2636.95
  Bottom Layer w30: v5(1956,3276) 3114,3276 ; v3(2240,2489) 3101,2489 3107,2495 3107,3269 3114,3276 ; 4944,2840 J10.1 ; v3(6480,1840) 6475,1845 v3(5980,1845) v3(5490,1845) 5035,1845 4940,1940 4940,2955 4619,3276 3114,3276 ; J2.4@7352.54,2510.95 7425.04,2438.45 v1(7790.04,2438.45) 7674.54,2322.95 v1@7674.54,2064.95
VCC5: C16.2 L1.2 U1.4@1423.98,1970 U2.3@1730,3150 | length 2181.6
  Top Layer w30: L1.2 1380,3207 1437,3150 U2.3@1730,3150 ; U1.4@1423.98,1970 1423.98,1874.02 1447,1851 1546,1851 1635,1940 1635,2251 ; 1635,3142 1635,2251 ; C16.2 1637.93,2248.07 1635,2251
VCC12: D7.2 F1.1 J1.1@1404.8,1160 J2.1@4770.2,1160 R10.1 R12.1@2010,1410 R37.1 R38.1 R68.1 U3.8 | length 10875.7
  Top Layer w30: R12.1@2010,1410 2010,1290 1950,1230 1950,1130 1880,1060 ; D7.2 2245,3303 2146,3402 1276,3402 1069,3195 1069,1641 F1.1 1215,1345 1400,1160 1404.8,1160 1504.8,1060 1880,1060 ; R68.1 2315,1300 2260,1245 2260,1155 2165,1060 ; R37.1 2620,1310 2560,1250 2560,1155 2465,1060 ; R38.1 2890,1295 2845,1250 2845,1125 2780,1060 ; R10.1 4215,2240 4294,2319 4598,2319 4645,2272 4645,2197 4644.06,2196.06 U3.8 ; 4651.5,2186.5 4868,1970 4868,1759.18 4770.2,1661.38 4770.2,1160 4670.2,1060 2780,1060 ; 1880,1060 2165,1060 ; 2165,1060 2465,1060 ; 2465,1060 2780,1060
VCC12_R: C25.2 C26.2 C27.2 D7.1 R60.2 R61.2 R62.2 R63.2 U4.9 | length 2819.4
  Top Layer w30: D7.1 2299.8,2794.8 C26.2 2554.8,2794.8 2600,2840 C25.2 2760,2840 2815.2,2784.8 C27.2 2910.2,2785 v3(3243,2785) ; 3245,2349.93 3245,2285 ; 3245,2353.93 v3(3245,2413) ; R63.2@3326,2019 3245,2100 3245,2285 ; R63.2 R62.2 R61.2 R60.2 ; U4.9 3246.54,2283.46 3245,2285
  Bottom Layer w30: v3(3243,2785) 3245,2783 v3(3245,2413)
pads on no net: J3. J3.3@8798.17,2635.95 J3.23 J3.24 J9. J9.3 J9.23 J9.24 KEY1.3 KEY1.4 R11.1 RESET1.3 RESET1.4 U1.6@1360.98,2422.76 U2.3@8827.54,2190.95 U2.6 U2.7 U4.5 U4.6 U4.7 U4.10 U4.11 U4.12

## Polygon pours and split planes (outlines as drawn)
GND on Bottom Layer "bottom Layer-GND" (solid, remove dead copper, pour order 4): 1005,1000 7000,1000 7000,1590 7000,3510 5080,3510 1005,3510
GND on Bottom Layer "bottom Layer-GND" (solid, remove dead copper, pour order 16): 7161.54,3507.95 9153.54,3507.95 9150.54,3504.95 9150.54,997.95 7158.54,997.95 7161.54,1000.95 7161.54,3507.95
GND on Top Layer "bottom Layer-GND" (solid, remove dead copper, pour order 3): 1005,1000 7000,1000 7000,1590 7000,3510 5080,3510 1005,3510
GND on Top Layer "Top Layer-GND" (solid, remove dead copper, pour order 14): 7161.54,3507.95 9153.54,3507.95 9153.54,997.95 7161.54,997.95 7161.54,3507.95
no net on Keep-Out Layer "Top Layer-No Net" (none, remove dead copper): 7258.54,1077.26 cw(c7258.54,1145.95) 7189.85,1145.95 cw(c7258.54,1145.95) 7258.54,1214.64 cw(c7258.54,1145.95) 7327.23,1145.95 cw(c7258.54,1145.95)
no net on Keep-Out Layer "Top Layer-No Net" (none, remove dead copper): 7258.54,1077.26 cw(c7258.54,1145.95) 7189.85,1145.95 cw(c7258.54,1145.95) 7258.54,1214.64 cw(c7258.54,1145.95) 7327.23,1145.95 cw(c7258.54,1145.95)
no net on Keep-Out Layer "Top Layer-No Net" (none, remove dead copper): 7258.54,1077.26 cw(c7258.54,1145.95) 7189.85,1145.95 cw(c7258.54,1145.95) 7258.54,1214.64 cw(c7258.54,1145.95) 7327.23,1145.95 cw(c7258.54,1145.95)

## Keep-outs
Keep-Out Layer:
  circle w10: c6870,1148 r68.69
  circle w10: c6870,3394 r68.69
  circle w10: c2880,3394 r68.69
  circle w10: c1105,3394 r68.69
  circle w10: c1105,1148 r68.69
  circle w10: c7258.54,3391.95 r68.69
  circle w10: c9033.54,3391.95 r68.69
  circle w10: c7258.54,1145.95 r68.69
  circle w10: c9033.54,1145.95 r68.69
  lines w7.87: 1004.92,997.95 1005,3510 7050.35,3510 9160,3510 9160,997.95 7158.54,997.95 1004.92,997.95 ; 7010,1020 7153.54,1020 7153.54,3485 7010,3485 7010,1020

## Silkscreen, mask and mechanical layers (free items; w line width, h text height)
Top Overlay:
  text "ZS-001" at 8471.54,3311.95 h100
  text "ZS-002" at 6034,3179 h100
  text "3.3V" at 5143,2871 h60 r270
  text "3.3V" at 7189.54,2491.95 h60
  text "GND" at 7183.54,2394.95 h60
  text "GND" at 8649.54,2367.95 h60
  text "GND" at 9016.54,2363.95 h60
  text "JTMS" at 7166.54,2283.95 h60
  text "3.3V" at 8657.54,2259.95 h60
  text "3.3V" at 9022.37,2255.95 h60
  text "JTCK" at 7166.54,2189.95 h60
  text "PA2" at 8674.54,2069.95 h60
  text "TXD" at 7182.54,2055.95 h60
  text "PA3" at 8676.54,1969.95 h60
  text "RXD" at 7182.54,1937.95 h60
  text "GND" at 7182.54,1839.95 h60
  text "OUT_1" at 4046.26,1329.72 h60
  text "IN_1" at 1903.54,1327.76 h60
  text "OUT_3" at 3455.71,1326.77 h60
  text "IN_2" at 2187.99,1325.79 h60
  text "IN_3" at 2491.14,1325.79 h60
  text "OUT_4" at 3165.35,1325.79 h60
  text "OUT_2" at 3753.94,1325.79 h60
  text "12V" at 4745,1325 h60
  text "IN_4" at 2787,1323 h60
  text "GND" at 4282.48,1322.83 h60
  text "485A" at 4420,1320 h60
  text "485B" at 4585,1320 h60
  text "12V" at 1375,1315 h60
  text "GND" at 1530,1315 h60
  text "AD8" at 5017.72,1314.96 h60
  text "AD6" at 5512.8,1314.96 h60
  text "AD5" at 5694,1313 h60
  text "AD7" at 5165,1310 h60
  text "AD2" at 6460,1310 h60
  text "AD1" at 6655,1310 h60
  text "AD3" at 6160.43,1306.1 h60
  text "AD4" at 6016.73,1305.12 h60
Mechanical 1:
  lines w7.87: 1004.92,997.95 7158.54,997.95 9160,997.95 9160,3510 7050.35,3510 1005,3510 1004.92,997.95